# Altium PCB BEE_BOARD.PcbDoc (part 1 of 2)
Units mm, origin at the board's own origin, x right, y up, seen from the top; angles counter-clockwise.
Board outline 146.54 x 65.01 mm, 8 copper layers (Top, GND_1, Signal_1, GND_2, PWR, Signal_2, GND_3, Bottom), stack 1.331 mm thick; 113 components, 76 nets, 368 pads, 14 vias.
Unrouted connection lines stored in the file: 262.
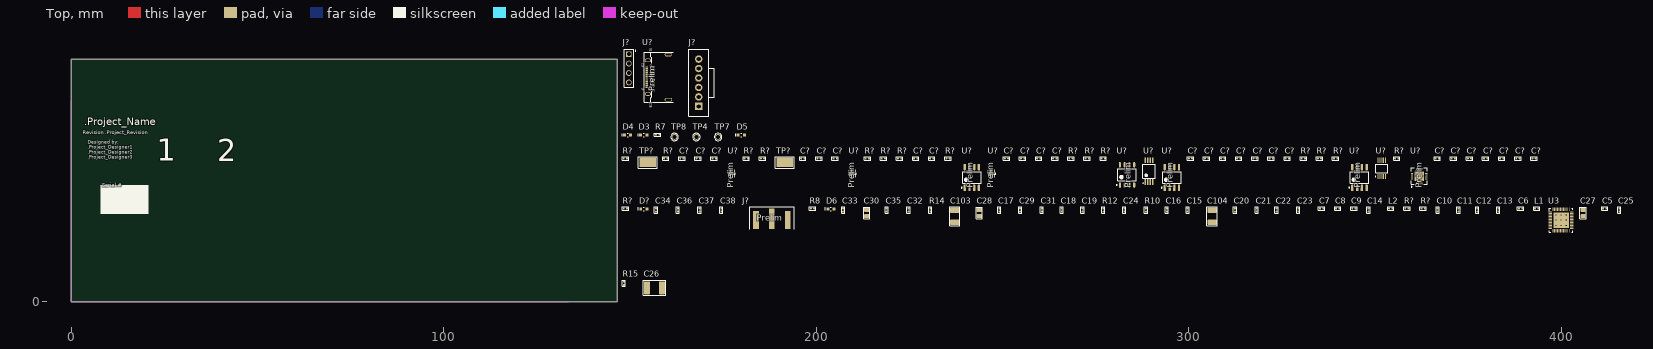
[diagram p0: Top view]
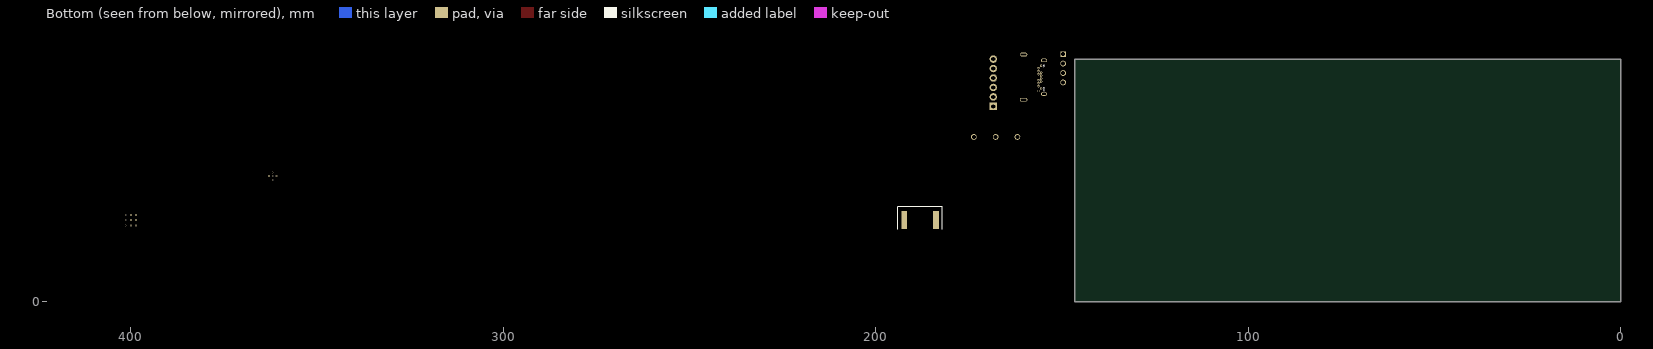
[diagram p1: Bottom view, seen from below]
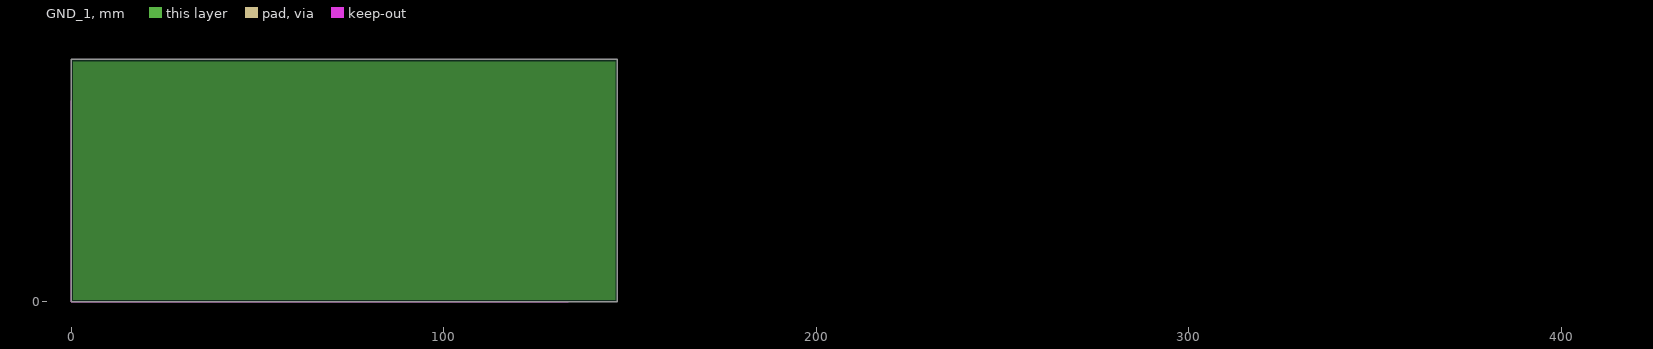
[diagram p2: GND_1, clearances drawn from the general rule]
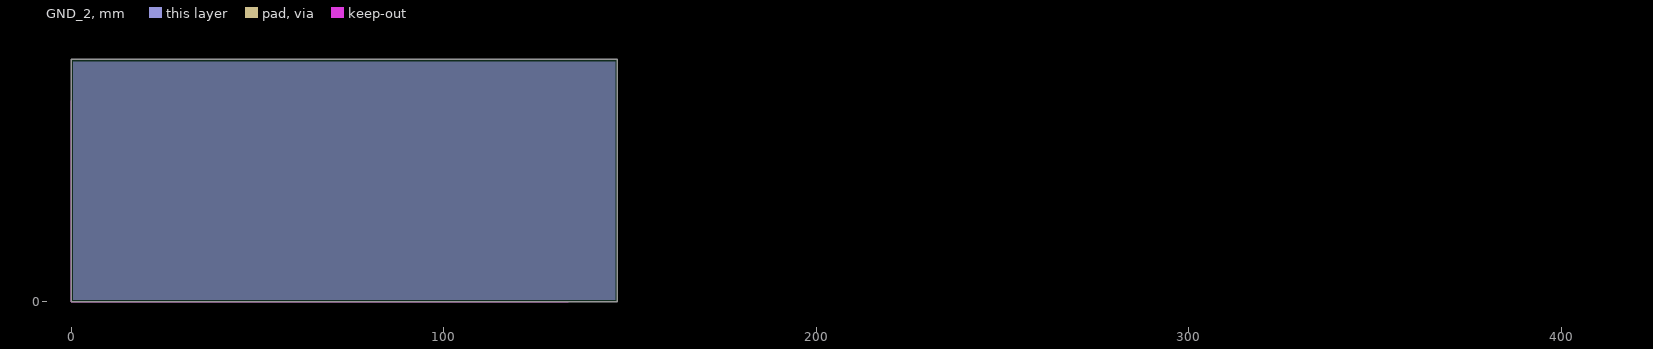
[diagram p3: GND_2, clearances drawn from the general rule]
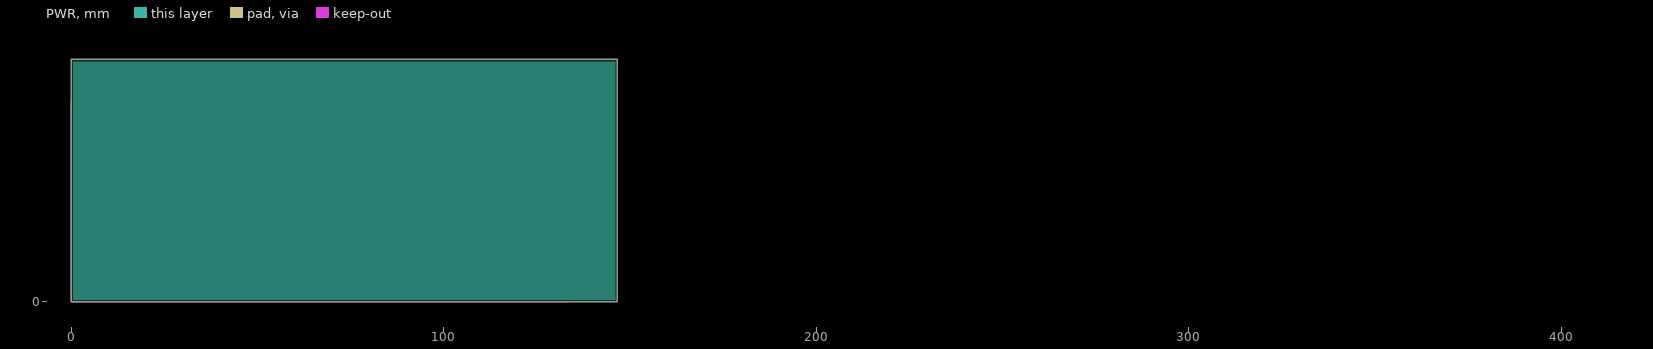
[diagram p4: PWR, clearances drawn from the general rule]
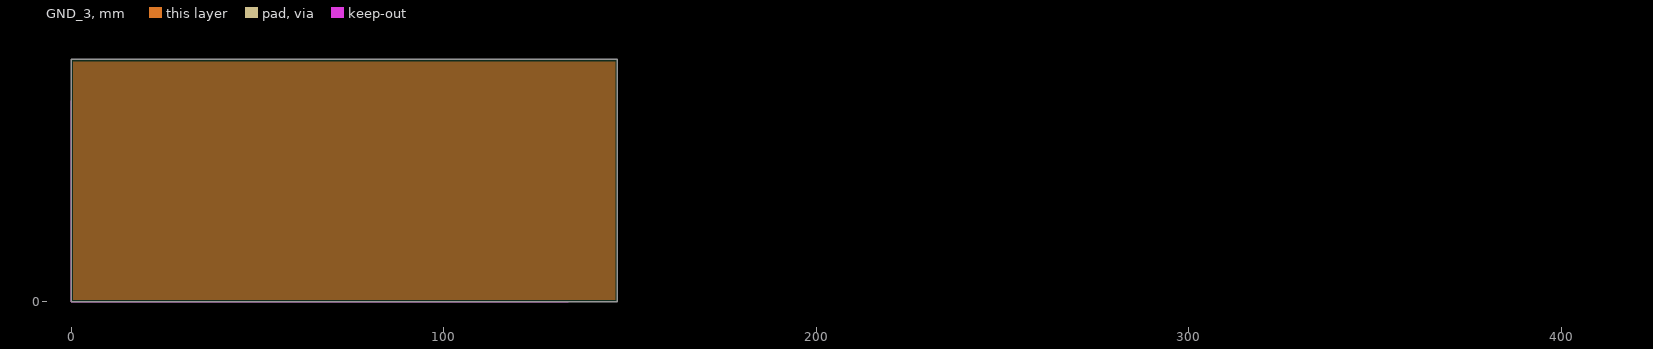
[diagram p5: GND_3, clearances drawn from the general rule]

## Layer stack, top to bottom
Top Solder: solder mask 0.0254, Solder Resist, Dk 4
Top: signal copper 0.0178
Dielectric 1: prepreg 0.0711, PP-006, Dk 4.1
GND_1: plane copper 0.0178
Dielectric 2: core 0.2032, Core-009, Dk 4.5
Signal_1: signal copper 0.0178
Dielectric 3: prepreg 0.2032, PP-006, Dk 4.1
GND_2: plane copper 0.0178
Dielectric 4: core 0.2032, Core-009, Dk 4.5
PWR: plane copper 0.0178
Dielectric 5: prepreg 0.2108, PP-006, Dk 4.1
Signal_2: signal copper 0.0178
Dielectric 6: core 0.2032, Core-009, Dk 4.5
GND_3: plane copper 0.0178
Dielectric 7: prepreg 0.094, PP-006, Dk 4.1
Bottom: signal copper 0.0178
Bottom Solder: solder mask 0.0152, Solder Resist, Dk 3.5

## Board outline
0,0 146.541,0 146.541,65.012 0,65

## Design rules (kind name [scope] priority, off if disabled: settings)
BoardOutlineClearance BoardOutlineClearance-Silk [(OnLayer('Bottom Overlay')) OR (OnLayer('Top Overlay'))] p1: gap=0 ignorepadtopadclearanceinfootprint=FALSE
BoardOutlineClearance BoardOutlineClearance-Fiducials [InComponentClass('Fiducials')] p2: gap=0 ignorepadtopadclearanceinfootprint=FALSE
BoardOutlineClearance BoardOutlineClearance-MouseBites [InComponentClass('MouseBites')] p3: gap=0.254 ignorepadtopadclearanceinfootprint=FALSE except(0: Arc-SplitContinuation Track-SplitContinuation SMDPad-SplitContinuation THPad-OutlineEdge THPad-CavityEdge THPad-CutoutEdge THPad-SplitBarrior THPad-SplitContinuation Via-SplitContinuation Fill-SplitContinuation Poly-SplitContinuation Region-OutlineEdge Region-CavityEdge Region-CutoutEdge Region-SplitBarrior Region-SplitContinuation Text-SplitContinuation; 0.508: Arc-OutlineEdge Track-OutlineEdge SMDPad-OutlineEdge Via-OutlineEdge Fill-OutlineEdge Poly-OutlineEdge Text-OutlineEdge)
BoardOutlineClearance [All] p4: gap=0.254 ignorepadtopadclearanceinfootprint=FALSE except(0: Arc-SplitContinuation Track-SplitContinuation SMDPad-SplitContinuation THPad-SplitContinuation Via-SplitContinuation Fill-SplitContinuation Poly-SplitContinuation Region-SplitContinuation Text-SplitContinuation)
Clearance Clearance_CON_TOP [(TouchesRoom('Ch0_Out_Down') OR TouchesRoom('Ch0_Out_Up') OR  TouchesRoom('Ch1_Out_Down') OR TouchesRoom('Ch1_Out_Up') OR  TouchesRoom('Ch2_Out_Down') OR TouchesRoom('Ch2_Out_Up') OR    TouchesRoom('Ch3_Out_Down') OR TouchesRoom('Ch3_Out_Up') OR    TouchesRoom('Ch4_Out_Down') OR TouchesRoom('Ch4_Out_Up') OR    TouchesRoom('Ch5_Out_Down') OR TouchesRoom('Ch5_Out_Up')   ) AND (InNetClass('HV') OR InNetClass('MID')) AND (OnTop OR OnMultiLayer) vs (TouchesRoom('Ch0_Out_Down') OR TouchesRoom('Ch0_Out_Up') OR  TouchesRoom('Ch1_Out_Down') OR TouchesRoom('Ch1_Out_Up') OR  TouchesRoom('Ch2_Out_Down') OR TouchesRoom('Ch2_Out_Up') OR    TouchesRoom('Ch3_Out_Down') OR TouchesRoom('Ch3_Out_Up') OR    TouchesRoom('Ch4_Out_Down') OR TouchesRoom('Ch4_Out_Up') OR    TouchesRoom('Ch5_Out_Down') OR TouchesRoom('Ch5_Out_Up')   ) AND (OnTop OR OnMultiLayer)] p1: gap=0.152 ignorepadtopadclearanceinfootprint=FALSE
Clearance Clearance_CON_BOT [(TouchesRoom('Ch0_In') OR TouchesRoom('Ch1_In') OR  TouchesRoom('Ch2_In') OR TouchesRoom('Ch3_In') OR  TouchesRoom('Ch4_In') OR TouchesRoom('Ch5_In') ) AND (InNetClass('HV') OR InNetClass('MID')) AND (OnBottom OR OnMultiLayer) vs (TouchesRoom('Ch0_In') OR TouchesRoom('Ch1_In') OR  TouchesRoom('Ch2_In') OR TouchesRoom('Ch3_In') OR  TouchesRoom('Ch4_In') OR TouchesRoom('Ch5_In'))   AND (OnBottom OR OnMultiLayer)] p2: gap=0.152 ignorepadtopadclearanceinfootprint=FALSE
Clearance Clearance_Via [IsVia vs (IsComponent AND NOT HasFootprint('REG_LDO_MIC5303-1.8YMT-TR'))] p3: gap=0.025 ignorepadtopadclearanceinfootprint=FALSE
Clearance HV-HV_EXT [InNetClass('HV') AND (OnTop OR OnBottom) vs InNetClass('HV') AND (OnTop OR OnBottom)] p4: gap=0.813 ignorepadtopadclearanceinfootprint=FALSE
Clearance HV-HV_INT [InNetClass('HV') vs InNetClass('HV')] p5: gap=0.406 ignorepadtopadclearanceinfootprint=FALSE
Clearance HV-MID_EXT [InNetClass('HV') AND (OnTop OR OnBottom) vs InNetClass('MID') AND (OnTop OR OnBottom)] p6: gap=0.406 ignorepadtopadclearanceinfootprint=FALSE
Clearance HV-MID_INT [InNetClass('HV') vs InNetClass('MID')] p7: gap=0.203 ignorepadtopadclearanceinfootprint=FALSE
Clearance HV-ALL_EXT [InNetClass('HV') AND (OnTop OR OnBottom) vs InNetClass('All Nets')] p8: gap=0.813 ignorepadtopadclearanceinfootprint=FALSE
Clearance HV-ALL_INT [InNetClass('HV') vs InNetClass('All Nets')] p9: gap=0.406 ignorepadtopadclearanceinfootprint=FALSE
Clearance MID-ALL_EXT [InNetClass('MID') AND (OnTop OR OnBottom) vs InNetClass('All Nets')] p10: gap=0.406 ignorepadtopadclearanceinfootprint=FALSE
Clearance MID_ALL_INT [InNetClass('MID') vs InNetClass('All Nets')] p11: gap=0.203 ignorepadtopadclearanceinfootprint=FALSE
Clearance [All] p12: gap=0.152 ignorepadtopadclearanceinfootprint=FALSE
ComponentClearance [All] p1: gap=0.102 collisioncheckmode=3 verticalgap=0.102 showdistances=FALSE
DiffPairsRouting [All] p1: maxlimit=0.152 minlimit=0.127 mostfreqgap=0.152 toplayer_mingap=0.152 toplayer_minwidth=0.102 toplayer_maxwidth=0.102 toplayer_prefwidth=0.102 midlayer1_maxgap=0.127 midlayer1_prefgap=0.127 midlayer1_minwidth=0.102 midlayer1_maxwidth=0.102 midlayer1_prefwidth=0.102 midlayer2_maxgap=0.127 midlayer2_prefgap=0.127 midlayer2_minwidth=0.102 midlayer2_maxwidth=0.102 midlayer2_prefwidth=0.102 bottomlayer_mingap=0.152 bottomlayer_minwidth=0.102 bottomlayer_maxwidth=0.102 bottomlayer_prefwidth=0.102 maxuncoupledlength=12.7
HoleSize [All] p1: absolutevalues=TRUE maxlimit=25.4 minlimit=0.102 maxpercent=80.000 minpercent=20.000
HoleToHoleClearance HoleToHoleClearance_Via [All] p1: gap=0.406 allowstackedmicrovias=TRUE
HoleToHoleClearance [All] p2: gap=0.254 allowstackedmicrovias=TRUE
MatchedLengths DiffMatching_WithinPair [InDifferentialPairClass('All Differential Pairs')] p1: tolerance=0.025 checknetsindiffpair=TRUE checkdiffpairvsdiffpair=FALSE checkxsignals=FALSE checkothers=FALSE
MatchedLengths CHANNEL_0 [InxSignalClass('xSignals_J1A_J2A')] p2: tolerance=0.127 checknetsindiffpair=FALSE checkdiffpairvsdiffpair=TRUE checkxsignals=TRUE checkothers=TRUE
MatchedLengths CHANNEL_1 [InxSignalClass('xSignals_J1B_J2B')] p3: tolerance=0.127 checknetsindiffpair=FALSE checkdiffpairvsdiffpair=TRUE checkxsignals=TRUE checkothers=TRUE
MatchedLengths CHANNEL_2 [InxSignalClass('xSignals_J1C_J2C')] p4: tolerance=0.127 checknetsindiffpair=FALSE checkdiffpairvsdiffpair=TRUE checkxsignals=TRUE checkothers=TRUE
MatchedLengths CHANNEL_3 [InxSignalClass('xSignals_J1D_J2D')] p5: tolerance=0.127 checknetsindiffpair=FALSE checkdiffpairvsdiffpair=TRUE checkxsignals=TRUE checkothers=TRUE
MatchedLengths CHANNEL_4 [InxSignalClass('xSignals_J1E_J2E')] p6: tolerance=0.127 checknetsindiffpair=FALSE checkdiffpairvsdiffpair=TRUE checkxsignals=TRUE checkothers=TRUE
MatchedLengths CHANNEL_5 [InxSignalClass('xSignals_J1F_J2F')] p7: tolerance=0.127 checknetsindiffpair=FALSE checkdiffpairvsdiffpair=TRUE checkxsignals=TRUE checkothers=TRUE
MinimumSolderMaskSliver [All] p1: minsoldermaskwidth=0.099
PlaneClearance PlaneClearance_HV [InNetClass('HV')] p1: clearance=0.254
PlaneClearance PlaneClearance_HV_MID [InNet('-HV_MID')] p2: clearance=0.203
PlaneClearance [All] p3: clearance=0.152
PlaneConnect [All] p1: pad.planeconnectstyle=Relief pad.reliefexpansion=0.508 pad.reliefentries=4 pad.reliefconductorwidth=0.254 pad.reliefairgap=0.254 via.planeconnectstyle=Direct via.reliefexpansion=0.508 via.reliefentries=4 via.reliefconductorwidth=0.254 via.reliefairgap=0.254
PolygonConnect [All] p1: thpad.connectstyle=Relief thpad.reliefconductorwidth=0.254 thpad.reliefentries=4 thpad.polygonreliefangle="90 Angle" thpad.airgapwidth=0.254 smdpad.connectstyle=Direct smdpad.reliefconductorwidth=0.254 smdpad.reliefentries=4 smdpad.polygonreliefangle="90 Angle" smdpad.airgapwidth=0.254 via.connectstyle=Direct via.reliefconductorwidth=0.254 via.reliefentries=4 via.polygonreliefangle="90 Angle" via.airgapwidth=0.254
RoomDefinition TOP [InComponentClass('TOP')] p1: confinementstyle=ConfineIn formatcopy=TRUE lockcomponents=FALSE outline 147.684,9.813 364.574,9.813 364.574,70.748 147.684,70.748
RoomDefinition POWER [InComponentClass('POWER')] p2: confinementstyle=ConfineIn formatcopy=TRUE lockcomponents=FALSE outline 147.684,42.909 181.517,42.909 181.517,48.04 147.684,48.04
RoomDefinition MISC [InComponentClass('MISC')] p3: confinementstyle=ConfineIn formatcopy=TRUE lockcomponents=FALSE outline 147.684,9.813 394.877,9.813 394.877,70.748 147.684,70.748
RoomDefinition DECAWAVE [InComponentClass('DECAWAVE')] p4: confinementstyle=ConfineIn formatcopy=TRUE lockcomponents=FALSE outline 147.684,9.813 419.692,9.813 419.692,70.748 147.684,70.748
RoomDefinition BEE_BOARD_TITLE [InComponentClass('BEE_BOARD_TITLE')] p5: confinementstyle=ConfineIn formatcopy=TRUE lockcomponents=FALSE outline 147.684,1.406 159.876,1.406 159.876,8.568 147.684,8.568
RoutingVias [All] p1: holewidth=0.254 width=0.457 viastyle="Through Hole" minholewidth=0.254 minwidth=0.457 maxholewidth=0.254 maxwidth=0.762
SilkToSilkClearance [All] p1: silktosilkclearance=0.025
SilkToSolderMaskClearance [IsPad] p1: minsilkscreentomaskgap=0.025 clearancetoexposedcopper=FALSE
SolderMaskExpansion [All] p1: expansion=0.051 istentingtop=FALSE
Width Width_POW [InNetClass('POWER')] p1: maxlimit=0.813 minlimit=0.152 preferedwidth=0.203 minimp=50.000000 maximp=50.000000 favimp=50.000000
Width [All] p2: maxlimit=0.152 minlimit=0.14 preferedwidth=0.152 toplayer_maxwidth=0.14 toplayer_prefwidth=0.14 midlayer1_minwidth=0.152 midlayer2_minwidth=0.152 bottomlayer_maxwidth=0.14 bottomlayer_prefwidth=0.14 minimp=50.000000 maximp=50.000000 favimp=50.000000
21 further rules are at their usual default settings.

## Classes and differential pairs
component class TOP: J? U?
component class POWER: C1 C2 C3 C4 D3 D4 D5 Q4 R2 R3 R6 R7 TP4 TP7 TP8 U1 U2
component class MISC: C? J? R? TP? U?
component class DECAWAVE: C5 C6 C7 C8 C9 C10 C11 C12 C13 C14 C15 C16 C17 C18 C19 C20 C21 C22 C23 C24 C25 C27 C28 C29 C30 C31 C32 C33 C34 C35 C36 C37 C38 C103 C104 D6 D? J? L1 L2 R8 R10 R12 R14 R? T1 U3
component class BEE_BOARD_TITLE: C26 FID? MTH? R15
differential pair SYNC: +SYNC_P -SYNC_N
differential pair SYNC_BB_LVDS: +SYNC_BB_LVDS_P -SYNC_BB_LVDS_N
differential pair SPI_MOSI: +SPI_MOSI_P -SPI_MOSI_N
differential pair SPI_MISO: +SPI_MISO_P -SPI_MISO_N
differential pair SPI_CLK: +SPI_CLK_P -SPI_CLK_N
differential pair RF: +RF_P -RF_N
differential pair CLK: +CLK_P -CLK_N
differential pair CLK_BB_LVDS: +CLK_BB_LVDS_P -CLK_BB_LVDS_N

## Components (designator, comment, footprint, x,y, rotation, side; value= is the part's Value field where it differs from the comment)
C5 "CGA2B3X7R1E104K050BB" CAP_CER_0402 411.59,25.002 r0 top value=100nF
C6 "CGA2B3X7R1E104K050BB" CAP_CER_0402 389.009,25.002 r0 top value=100nF
C7 "CGA2B3X7R1E104K050BB" CAP_CER_0402 335.618,25.002 r0 top value=100nF
C8 "CGA2B3X7R1E104K050BB" CAP_CER_0402 339.936,25.002 r0 top value=100nF
C9 "CGA2B3X7R1E104K050BB" CAP_CER_0402 344.28,25.002 r0 top value=100nF
C10 "CGA2B3X7R1E104K050BB" CAP_CER_0402 366.759,24.596 r90 top value=100nF
C11 "CL05B103KB5NFNC" CAP_CER_0402 372.347,24.596 r90 top value=10nF
C12 "CC0402KRX7R9BB102" CAP_CER_0402 377.427,24.596 r90 top value=1nF
C13 "CC0402JRNPO9BN120" CAP_CER_0402 383.015,24.596 r90 top value=12pF
C14 "CGA2B3X7R1E104K050BB" CAP_CER_0402 348.191,24.596 r90 top value=100nF
C15 "CC0402JRNPO9BN270" CAP_CER_0402 299.652,24.596 r90 top value=27pF
C16 "C0402C129C5GACTU" CAP_CER_0402 294.064,24.596 r90 top value=1.2pF
C17 "CGA2B3X7R1E104K050BB" CAP_CER_0402 249.106,24.596 r90 top value=100nF
C18 "GRM1555C1H180GA01D" CAP_CER_0402 265.87,24.596 r90 top value=18pF
C19 "CC0402KRX7R9BB821" CAP_CER_0402 271.458,24.596 r90 top value=820pF
C20 "CGA2B3X7R1E104K050BB" CAP_CER_0402 312.352,24.596 r90 top value=100nF
C21 "CL05B103KB5NFNC" CAP_CER_0402 318.194,24.596 r90 top value=10nF
C22 "CC0402KRX7R9BB102" CAP_CER_0402 323.503,24.596 r90 top value=1nF
C23 "CC0402JRNPO9BN120" CAP_CER_0402 329.345,24.596 r90 top value=12pF
C24 "CGA2B3X7R1E104K050BB" CAP_CER_0402 282.634,24.596 r90 top value=100nF
C25 "CGA2B3X7R1E104K050BB" CAP_CER_0402 415.501,24.596 r90 top value=100nF
C26 "PRELIM" CAP_CER_1812 156.574,3.717 r0 top
C27 "C2012X7R1E475K125AE" CAP_CER_0805 405.799,23.808 r90 top value=4.7uF
C28 "C2012X7R1E475K125AE" CAP_CER_0805 243.747,23.808 r90 top value=4.7uF
C29 "CGA2B3X7R1E104K050BB" CAP_CER_0402 254.694,24.596 r90 top value=100nF
C30 "C2012X7R1E475K125AE" CAP_CER_0805 213.521,23.808 r90 top value=4.7uF
C31 "CGA2B3X7R1E104K050BB" CAP_CER_0402 260.536,24.596 r90 top value=100nF
C32 "CC0402JRNPO9BN101" CAP_CER_0402 224.722,24.596 r90 top value=100pF
C33 "CC0402JRNPO9BN120" CAP_CER_0402 207.196,24.596 r90 top value=12pF
C34 "CC0402JRNPO9BN120" CAP_CER_0402 156.98,24.596 r90 top value=12pF
C35 "CGA2B3X7R1E104K050BB" CAP_CER_0402 218.88,24.596 r90 top value=100nF
C36 "CGA2B3X7R1E104K050BB" CAP_CER_0402 162.822,24.596 r90 top value=100nF
C37 "CGA2B3X7R1E104K050BB" CAP_CER_0402 168.664,24.596 r90 top value=100nF
C38 "CGA2B3X7R1E104K050BB" CAP_CER_0402 174.506,24.596 r90 top value=100nF
C103 "C3225X7R1E226M250AB" CAP_CER_1210 237.143,22.919 r90 top value=22uF
C104 "C3225X7R1E226M250AB" CAP_CER_1210 306.231,22.919 r90 top value=22uF
C? "CC0402KRX7R9BB102" CAP_CER_0402 230.996,38.439 r0 top value=1nF
C? "CGA2B3X7R1E104K050BB" CAP_CER_0402 251.036,38.439 r0 top value=100nF
C? "CC0402KRX7R9BB102" CAP_CER_0402 205.037,38.439 r0 top value=1nF
C? "CC0402KRX7R9BB102" CAP_CER_0402 366.657,38.439 r0 top value=1nF
C? "CGA2B3X7R1E104K050BB" CAP_CER_0402 326.373,38.439 r0 top value=100nF
C? "CGA2B3X7R1E104K050BB" CAP_CER_0402 392.616,38.439 r0 top value=100nF
C? "CGA2B3X7R1E104K050BB" CAP_CER_0402 226.678,38.439 r0 top value=100nF
C? "CL05A105KL5NRNC" CAP_CER_0402 196.376,38.439 r0 top value=1uF
C? "CGA2B3X7R1E104K050BB" CAP_CER_0402 264.016,38.439 r0 top value=100nF
C? "CC0402KRX7R9BB102" CAP_CER_0402 388.298,38.439 r0 top value=1nF
C? "CGA2B3X7R1E104K050BB" CAP_CER_0402 172.576,38.439 r0 top value=100nF
C? "CC0402KRX7R9BB102" CAP_CER_0402 322.055,38.439 r0 top value=1nF
C? "CGA2B3X7R1E104K050BB" CAP_CER_0402 379.637,38.439 r0 top value=100nF
C? "CL05A105KL5NRNC" CAP_CER_0402 163.914,38.439 r0 top value=1uF
C? "CC0402KRX7R9BB102" CAP_CER_0402 255.354,38.439 r0 top value=1nF
C? "CC0402KRX7R9BB102" CAP_CER_0402 317.737,38.439 r0 top value=1nF
C? "CC0402KRX7R9BB102" CAP_CER_0402 259.698,38.439 r0 top value=1nF
C? "CGA2B3X7R1E104K050BB" CAP_CER_0402 370.975,38.439 r0 top value=100nF
C? "CC0402KRX7R9BB102" CAP_CER_0402 168.258,38.439 r0 top value=1nF
C? "CGA2B3X7R1E104K050BB" CAP_CER_0402 304.732,38.439 r0 top value=100nF
C? "CGA2B3X7R1E104K050BB" CAP_CER_0402 200.719,38.439 r0 top value=100nF
C? "CC0402KRX7R9BB102" CAP_CER_0402 300.414,38.439 r0 top value=1nF
C? "CL05A105KL5NRNC" CAP_CER_0402 375.293,38.439 r0 top value=1uF
C? "CL05A105KL5NRNC" CAP_CER_0402 309.075,38.439 r0 top value=1uF
C? "CGA2B3X7R1E104K050BB" CAP_CER_0402 313.393,38.439 r0 top value=100nF
C? "CC0402KRX7R9BB102" CAP_CER_0402 383.955,38.439 r0 top value=1nF
D3 "SML-D12P8WT86" LED_SML-D12P8WT86 153.678,44.738 r0 top value="560 nm (green)"
D4 "SML-D12P8WT86" LED_SML-D12P8WT86 149.36,44.738 r0 top value="560 nm (green)"
D5 "SML-D12P8WT86" LED_SML-D12P8WT86 179.866,44.738 r0 top value="560 nm (green)"
D6 "SML-D12P8WT86" LED_SML-D12P8WT86 203.894,24.901 r0 top value="560 nm (green)"
D? "SML-D12P8WT86" LED_SML-D12P8WT86 153.704,24.901 r0 top value="560 nm (green)"
J? "CONSMA020.062-G" CON_SMA_CONSMA020.062-G 188.07,19.465 r0 top value="50 ohm"
J? "CON_HDR_1X4" CON_HDR_1X4 149.69,58.835 r0 top
J? "0705430005" CON_HDR_0705430005 168.436,58.759 r90 top
L1 "BLM15AG601SN1D" FER_0402 393.353,25.002 r0 top value=600R@100Mhz
L2 "BLM15AG601SN1D" FER_0402 354.186,25.002 r0 top value=600R@100Mhz
R7 "RC0402FR-0710KL" RES_0402 157.412,44.84 r0 top value=10k
R8 "RC0402FR-07150RL" RES_0402 198.966,25.002 r0 top value=150R
R10 "RC0402FR-0716KL" RES_0402 288.476,24.596 r90 top value=16k
R12 "RC0402FR-07270RL" RES_0402 277.046,24.596 r90 top value=270R
R14 "RC0402FR-0711KL" RES_0402 230.564,24.596 r90 top value=11k
R15 "PRELIM" RES_0402 148.344,4.962 r90 top
R? "RC0402FR-0710KL" RES_0402 362.847,25.002 r0 top value=10k
R? "RC0402FR-0710KL" RES_0402 358.504,25.002 r0 top value=10k
R? "RC0402FR-07150RL" RES_0402 148.751,25.002 r0 top value=150R
R? "RC0402FR-0710KL" RES_0402 268.334,38.439 r0 top value=10k
R? "RC0402FR-071KL" RES_0402 272.677,38.439 r0 top value=1k
R? "RMCF0402FT110K" RES_0402 181.212,38.439 r0 top value=110K
R? "RMCF0402FT562R" RES_0402 335.034,38.439 r0 top value=562R
R? "RC0402FR-07100RP" RES_0402 276.995,38.439 r0 top value=100R
R? "RC0402FR-071KL" RES_0402 213.698,38.439 r0 top value=1k
R? "RC0402FR-0710KL" RES_0402 222.334,38.439 r0 top value=10k
R? "RC0402FR-0710KL" RES_0402 185.555,38.439 r0 top value=10k
R? "RC0402FR-071KL" RES_0402 218.016,38.439 r0 top value=1k
R? "RC0402FR-07100RP" RES_0402 235.339,38.439 r0 top value=100R
R? "RC0402FR-0784R5L" RES_0402 339.378,38.439 r0 top value=84R5
R? "RMCF0402FT110K" RES_0402 159.596,38.439 r0 top value=110K
R? "RMCF0402FT562R" RES_0402 355.786,38.439 r0 top value=562R
R? "RC0402FR-0710KL" RES_0402 148.751,38.439 r0 top value=10k
R? "RC0402FR-0784R5L" RES_0402 330.716,38.439 r0 top value=84R5
TP4 "100MIL" TPO_TH_ROUND_100MIL 167.801,44.205 r0 top
TP7 "100MIL" TPO_TH_ROUND_100MIL 173.643,44.205 r0 top
TP8 "100MIL" TPO_TH_ROUND_100MIL 161.959,44.205 r0 top
TP? "5019" TPO_SMD_5019 154.77,37.372 r0 top value="3.81mm x 2.03mm"
TP? "5019" TPO_SMD_5019 191.55,37.372 r0 top value="3.81mm x 2.03mm"
U3 "DW1000-I-TR13" COM_XCV_DW1000-I-TR13 399.88,21.878 r0 top
U? "DS25CP102TSQ/NOPB" IC_CROSS_DS25CP102 361.806,33.689 r90 top value=2:2
U? "PI6C49CB01Q3WEX" CLK_BUF_PI6C49CB01Q3WEX 283.396,34.019 r90 top value=1:1
U? "SN74LVC1G07DRLR" BUF_SN74LVC1G07DRLR 209.965,34.4 r90 top value="1 bit"
U? "FIN1028MX" BUF_FIN1028MX 241.74,33.333 r90 top value=400Mbps
U? "SN74LVC1G07DRLR" BUF_SN74LVC1G07DRLR 177.503,34.4 r90 top value="1 bit"
U? "LMK1C1102PWR" COM_BUF_LMK1C1102PWR 289.289,35.01 r90 top
U? "FIN1027AMX" BUF_FIN1027AMX 295.436,33.333 r90 top value=600Mbps
U? "SN74LVC1G07DRLR" BUF_SN74LVC1G07DRLR 247.303,34.4 r90 top value="1 bit"
U? "FIN1028MX" BUF_FIN1028MX 345.778,33.333 r90 top value=400Mbps
U? "TMUX154EDGSR" LOG_MUX_TMUX154EDGSR 351.773,35.797 r90 top value=-
U? "USB-C31-S-RA-EH2.0B-BK-T/R" CON_USB-C_USB-C31-S-RA-EH2.0B-BK-T/R 156.853,60.257 r90 top value=24pins

## Footprints (in the part's own frame and the unit in brackets; to place one, negate y for a bottom-side part, rotate by r counter-clockwise, add the part's x,y. Pads: shape width x height; smd on the part's side, far side on the other; paste and mask are expansions set on the pad)
BUF_FIN1027AMX [mm] "8-SOIC"
  rrect50% 1.75x0.65 smd paste-0.05 mask+0.05: 1(-2.8,1.905) 2(-2.8,0.635) 3(-2.8,-0.635) 4(-2.8,-1.905) 5(2.8,-1.905) 6(2.8,-0.635) 7(2.8,0.635) 8(2.8,1.905)
  silkscreen extent -2.85,-2.5 1.6,2.88, body extent -3,-2.5 3,2.5, height 1.75
BUF_FIN1028MX [mm] "8-SOIC"
  rrect50% 1.75x0.65 smd paste-0.05 mask+0.05: 1(-2.8,1.905) 2(-2.8,0.635) 3(-2.8,-0.635) 4(-2.8,-1.905) 5(2.8,-1.905) 6(2.8,-0.635) 7(2.8,0.635) 8(2.8,1.905)
  silkscreen extent -2.85,-2.5 1.6,2.88, body extent -3,-2.5 3,2.5, height 1.75
BUF_SN74LVC1G07DRLR [mm] "SOT-5"
  rrect50% 0.67x0.3 smd paste-0.05 mask+0.05: 1(-0.74,0.5) 2(-0.74,0) 3(-0.74,-0.5) 4(0.74,-0.5) 5(0.74,0.5)
  silkscreen extent -0.45,-0.8 0.17,1.2, body extent -0.8,-0.8 0.8,0.8, height 0.6
CAP_CER_0402 [mil] "Ceramic Capacitor - 0402"
  rrect60% 20x20 smd paste+0 mask+1.97: 1(-17.5,0) 2(17.5,0)
  silkscreen extent -33,-17 33,17, body extent -19,-10 20,10, height 20
CAP_CER_0805 [mil] "Ceramic Capacitor - 0805"
  rrect37% 43x55 smd paste+0 mask+1.97: 1(-33.5,0) 2(33.5,0)
  silkscreen extent -61,-33 61,33, body extent -39,-24 40,25, height 49
CAP_CER_1210 [mm] "Ceramic Capacitor - 1210"
  rrect40% 1.5x2.5 smd paste+0 mask+0.05: 1(-1.6,0) 2(1.6,0)
  silkscreen extent -2.5,-1.4 2.5,1.4, body extent -1.57,-1.24 1.63,1.26, height 2.5
CAP_CER_1812 [mm]
  rrect25% 1.6x3.5 smd paste-0.025 mask+0.05: 1(-2,0) 2(2,0)
  silkscreen extent -3,-2 3,2, body extent -2.3,-1.6 2.3,1.6, height 1.3
CLK_BUF_PI6C49CB01Q3WEX [mm] "SOIC-8"
  oval 1.45x0.6 smd paste-0.05 mask+0.05: 1(-2.725,1.905) 2(-2.725,0.635) 3(-2.725,-0.635) 4(-2.725,-1.905) 5(2.725,-1.905) 6(2.725,-0.635) 7(2.725,0.635) 8(2.725,1.905)
  silkscreen extent -2.85,-2.5 1.6,2.88, body extent -3,-2.5 3,2.5, height 1.75
COM_BUF_LMK1C1102PWR [mm] "TSOP, 8-Leads, Body 3,00x4,40mm, Pitch 0,65mm, IPC Medium Density"
  rrect20% 1.5x0.45 smd paste-0.05 mask+0.05: 1(-2.9,0.975) 2(-2.9,0.325) 3(-2.9,-0.325) 4(-2.9,-0.975) 5(2.9,-0.975) 6(2.9,-0.325) 7(2.9,0.325) 8(2.9,0.975)
  silkscreen extent -3.25,-1.68 1.85,1.68, body extent -3.2,-1.55 3.2,1.55, height 1.2
COM_XCV_DW1000-I-TR13 [mm] "QFN 48 package, 0.5mm pitch"
  rrect20% 0.95x0.22 smd paste-0.025 mask+0.04: 1(-2.9,2.2) 2(-2.9,1.8) 3(-2.9,1.4) 4(-2.9,1) 5(-2.9,0.6) 6(-2.9,0.2) 7(-2.9,-0.2) 8(-2.9,-0.6) 9(-2.9,-1) 10(-2.9,-1.4) 11(-2.9,-1.8) 12(-2.9,-2.2) 25(2.9,-2.2) 26(2.9,-1.8) 27(2.9,-1.4) 28(2.9,-1) 29(2.9,-0.6) 30(2.9,-0.2) 31(2.9,0.2) 32(2.9,0.6) 33(2.9,1) 34(2.9,1.4) 35(2.9,1.8) 36(2.9,2.2)
  rrect20% 0.22x0.95 smd paste-0.025 mask+0.04: 13(-2.2,-2.9) 14(-1.8,-2.9) 15(-1.4,-2.9) 16(-1,-2.9) 17(-0.6,-2.9) 18(-0.2,-2.9) 19(0.2,-2.9) 20(0.6,-2.9) 21(1,-2.9) 22(1.4,-2.9) 23(1.8,-2.9) 24(2.2,-2.9) 37(2.2,2.9) 38(1.8,2.9) 39(1.4,2.9) 40(1,2.9) 41(0.6,2.9) 42(0.2,2.9) 43(-0.2,2.9) 44(-0.6,2.9) 45(-1,2.9) 46(-1.4,2.9) 47(-1.8,2.9) 48(-2.2,2.9)
  rect 4.2x4.2 smd paste-5 mask+0.07: 49(0,0)
  silkscreen extent -3.27,-3.2 3.2,3.2, body extent -3.05,-3.05 3.05,3.05, height 0.9
CON_HDR_1X4 [mil]
  rect 60x60 hole 40: 1(0,299.61)
  round 60 hole 40: 2(0,199.61) 3(0,99.61) 4(0,0)
  silkscreen extent -50,-50 75,350
CON_HDR_0705430005 [mm]
  rect 2x2 hole 1.092: 1(-6.35,0)
  round 2 hole 1.092: 2(-3.81,0) 3(-1.27,0) 4(1.27,0) 5(3.81,0) 6(6.35,0)
  silkscreen extent -9.02,-4.19 9.02,2.67, body extent -8.89,-4.06 8.89,2.54, height 11.87
CON_SMA_CONSMA020.062-G [mm] "ADGE SMA femal connector"
  rect 1.5x5.6 smd paste-0.05 mask+0.05: 1(0,2.8)
  rect 1.6x4.9 smd: 2(-4.26,2.45) 3(4.26,2.45)
  rect 1.6x4.9 smd far side paste-0.05 mask+0.05: 4(-4.26,2.45) 5(4.26,2.45)
  silkscreen extent -6,0 6,6, body extent -4.76,-9.5 4.76,4.7, height 4.35
CON_USB-C_USB-C31-S-RA-EH2.0B-BK-T/R [mm] "USB-C 24 pins"
  round 0.6 hole 0.65 unplated mask+0: 0(-3.725,0.55)
  rect 0.35x0.7 hole 4.7 square unplated: 0(0,-2.35)
  round 0.6 hole 0.65 slot 0.8 at 0 deg unplated mask+0: 0(3.725,0.55)
  oval 1x1.6 hole 1.1 slot 0.5 at 0 deg: 1(-4.5,2.05) 2(4.5,2.05)
  oval 1x2 hole 1.5 slot 0.5 at 0 deg: 3(-6.075,-3.45) 4(6.075,-3.45)
  rect 0.35x0.7 smd mask+0: A1(-2.75,2.36) A2(-2.25,2.36) A3(-1.75,2.36) A4(-1.25,2.36) A5(-0.75,2.36) A6(-0.25,2.36) A7(0.25,2.36) A8(0.75,2.36) A9(1.25,2.36) A10(1.75,2.36) A11(2.25,2.36) A12(2.75,2.36)
  round 0.65 hole 0.4 mask+0: B1(3.05,1.25) B2(2.4,0.55) B3(1.6,0.55) B4(1.2,1.25) B5(0.8,0.55) B6(0.4,1.25) B7(-0.4,1.25) B8(-0.8,0.55) B9(-1.2,1.25) B10(-1.6,0.55) B11(-2.4,0.55) B12(-3.05,1.25)
  silkscreen extent -6.75,-4.7 6.75,3.1, body extent -6.18,-5.85 6.18,2.8, height 2
FER_0402 [mil] "Ferrite - 0402"
  rrect60% 20x20 smd paste+0 mask+1.97: 1(-17.5,0) 2(17.5,0)
  silkscreen extent -33,-17 33,17, body extent -20,-10 20,10, height 19
IC_CROSS_DS25CP102 [mm] "WQFN-16"
  oval 0.6x0.25 smd paste-0.05 mask+0.05: 1(-1.9,0.75) 2(-1.9,0.25) 3(-1.9,-0.25) 4(-1.9,-0.75) 9(1.9,-0.75) 10(1.9,-0.25) 11(1.9,0.25) 12(1.9,0.75)
  oval 0.25x0.6 smd paste-0.05 mask+0.05: 5(-0.75,-1.9) 6(-0.25,-1.9) 7(0.25,-1.9) 8(0.75,-1.9) 13(0.75,1.9) 14(0.25,1.9) 15(-0.25,1.9) 16(-0.75,1.9)
  rect 2.6x2.6 smd paste-1.3 mask+0.05: 17(0,0)
  silkscreen extent -2.97,-2.2 2.2,2.2, body extent -2.05,-2.05 2.05,2.05, height 0.8
LED_SML-D12P8WT86 [mm] "0603"
  rect 0.8x0.8 smd paste-0.025 mask+0.07: A(0.825,0) K(-0.825,0)
  silkscreen extent -1.45,-0.48 0.13,0.48, body extent -0.8,-0.4 0.8,0.4, height 0.6
LOG_MUX_TMUX154EDGSR [mm] "TSSOP, 10-Leads, Body 3.00x3.00mm, Pitch 0.50mm, IPC Medium Density"
  rrect30% 1.45x0.3 smd paste-0.025 mask+0.05: 1(-2.2,1) 2(-2.2,0.5) 3(-2.2,0) 4(-2.2,-0.5) 5(-2.2,-1) 6(2.2,-1) 7(2.2,-0.5) 8(2.2,0) 9(2.2,0.5) 10(2.2,1)
  silkscreen extent -2.32,-1.6 1.15,1.82, body extent -2.45,-1.55 2.45,1.55, height 1.1
RES_0402 [mil] "Resistor - 0402"
  rrect60% 20x20 smd paste+0 mask+1.97: 1(-17.5,0) 2(17.5,0)
  silkscreen extent -33,-17 33,17, body extent -20,-10 20,10, height 13
TPO_SMD_5019 [mm] "PC TEST POINT MINI SMD"
  rect 4.5x2.53 smd paste-5 mask+0.07: 1(0,0)
  silkscreen extent -2.54,-1.52 2.54,1.52, body extent -1.9,-1.01 1.91,1.02, height 2.29
TPO_TH_ROUND_100MIL [mil]
  round 60 hole 42.91 mask+4: 1(0,0)
  silkscreen extent -39,-39 39,39

## Part data
C5 C6 C7 C8 C9 C10 C14 C17 C20 C24 C25 C29 C31 C35 C36 C37 C38 C? C? C? C? C? C? C? C? C? C? C?: library part CAP_CER_CGA2B3X7R1E104K050BB, "CAP - CER 0.1µF 10% 25V X7R - 0402", Manufacturer #1="TDK Corporation", Package=0402, Supplier Part Number 1=445-6902-1-ND, Temperature="-55°C ~ 125°C", Tolerance=10%, Voltage Rating=25V, Assembly Type=SMD, CreatedBy/Date="Nicolas Roy 2018-11-07", Cryo=UNKNOWN, GRAMS Lib Spec=2.8, HelpURL=https://product.tdk.com/info/en/catalog/datasheets/mlcc_automotive_general_en.pdf, Magnetic Material=Unknown, Part Number #1=CGA2B3X7R1E104K050BB, Polarized=NO, Supplier 1=Digi-Key, VerifiedBy="Nicolas V. (2019-01-22)"
C11 C21: library part CAP_CER_CL05B103KB5NFNC, "CAP - CER 10nF ±10% 50V X7R - 0402", Manufacturer #1="Samsung Electro-Mechanics", Package=0402, Supplier Part Number 1=1276-1499-1-ND, Temperature="-55°C ~ 125°C", Tolerance=10%, Voltage Rating=50V, Assembly Type=SMD, CreatedBy/Date="Keven Deslandes - 2018/11/20", Cryo=UNKNOWN, GRAMS Lib Spec=2.8, HelpURL=http://www.samsungsem.com/kr/support/product-search/mlcc/CL05B103KB5NFNC.jsp, Magnetic Material=Unknown, Part Number #1=CL05B103KB5NFNC, Polarized=No, Supplier 1=Digi-Key, VerifiedBy="Nicolas Roy - 2018/12/11"
C12 C22 C? C? C? C? C? C? C? C? C? C? C?: library part CAP_CER_CC0402KRX7R9BB102, "CAP - CER 1nF 10% 50V X7R - 0402", Manufacturer #1=Yageo, Package=0402, Supplier Part Number 1=311-1036-1-ND, Temperature="-55°C ~ 125°C", Tolerance=10%, Voltage Rating=50V, Assembly Type=SMD, CreatedBy/Date="Jonathan Bouchard 2019-04-06", Cryo=UNKNOWN, GRAMS Lib Spec=2.8, HelpURL=http://www.yageo.com/documents/recent/UPY-GPHC_X7R_6.3V-to-50V_18.pdf, Magnetic Material=UNKNOWN, Part Number #1=CC0402KRX7R9BB102, Polarized=NO, Supplier 1=Digi-Key, VerifiedBy="Nicolas V. (2019-04-30)"
C13 C23 C33 C34: library part CAP_CER_CC0402JRNPO9BN120, "CAP - CER 12pF 50V ±5% C0G, NP0 - 0402", Manufacturer #1=Yageo, Package=0402, Supplier Part Number 1=311-1016-1-ND, Temperature="-55°C ~ 125°C", Tolerance=±5%, Voltage Rating=50V, Assembly Type=SMD, CreatedBy/Date="Philippe Arsenault/ 2020-07-24", Cryo=UNKNOWN, GRAMS Lib Spec=2.8, HelpURL=https://www.yageo.com/upload/media/product/productsearch/datasheet/mlcc/UPY-GP_NP0_16V-to-50V_18.pdf, Magnetic Material=Unknown, Part Number #1=CC0402JRNPO9BN120, Polarized=NO, Supplier 1=Digi-Key, VerifiedBy="Louis-Daniel Gaulin / 2020-07-29"
C15: library part CAP_CER_CC0402JRNPO9BN270, "CAP - CER 27pF 50V ±5% C0G, NP0 - 0402", Manufacturer #1=Yageo, Package=0402, Supplier Part Number 1=311-1019-1-ND, Temperature="-55°C ~ 125°C", Tolerance=±5%, Voltage Rating=50V, Assembly Type=SMD, CreatedBy/Date="Philippe Arsenault/ 2020-07-24", Cryo=UNKNOWN, GRAMS Lib Spec=2.8, HelpURL=https://www.yageo.com/upload/media/product/productsearch/datasheet/mlcc/UPY-GP_NP0_16V-to-50V_18.pdf, Magnetic Material=Unknown, Part Number #1=CC0402JRNPO9BN270, Polarized=NO, Supplier 1=Digi-Key, VerifiedBy="Louis-Daniel Gaulin / 2020-07-29"
C16: library part CAP_CER_C0402C129C5GACTU, "CAP - CER 1.2pF 50V ±0.25pF C0G, NP0 - 0402", Manufacturer #1=KEMET, Package=0402, Supplier Part Number 1=399-1001-1-ND, Temperature="-55°C ~ 125°C", Tolerance=±0.25pF, Voltage Rating=50V, Assembly Type=SMD, CreatedBy/Date="Philippe Arsenault/ 2020-07-24", Cryo=UNKNOWN, GRAMS Lib Spec=2.8, HelpURL=https://content.kemet.com/datasheets/KEM_C1003_C0G_SMD.pdf, Magnetic Material=Unknown, Part Number #1=C0402C129C5GACTU, Polarized=NO, Supplier 1=Digi-Key, VerifiedBy="Louis-Daniel Gaulin / 2020-07-29"
C18: library part CAP_CER_GRM1555C1H180GA01D, "CAP - CER 18pF 50V C0G, NPO - 0402", Manufacturer #1="Murata Electronics North America", Package=0402, Supplier Part Number 1=490-6204-1-ND, Temperature="-55°C ~ 125°C", Tolerance=2%, Voltage Rating=50V, Assembly Type=SMD, CreatedBy/Date="Tommy Rossignol / 2018-11-20", Cryo=UNKNOWN, GRAMS Lib Spec=2.8, HelpURL=https://psearch.en.murata.com/capacitor/product/GRM1555C1H180GA01%23.html, Magnetic Material=UNKNOWN, Note="Not for new Design", Part Number #1=GRM1555C1H180GA01D, Polarized=NO, Supplier 1=Digi-Key, VerifiedBy="Caroline Paulin - 13 fév 2019"
C19: library part CAP_CER_CC0402KRX7R9BB821, "CAP - CER 820pF 50V ±10% X7R - 0402", Manufacturer #1=Yageo, Package=0402, Supplier Part Number 1=311-1727-1-ND, Temperature="-55°C ~ 125°C", Tolerance=±10%, Voltage Rating=50V, Assembly Type=SMD, CreatedBy/Date="Philippe Arsenault/ 2020-07-24", Cryo=UNKNOWN, GRAMS Lib Spec=2.8, HelpURL=https://www.yageo.com/upload/media/product/productsearch/datasheet/mlcc/UPY-GPHC_X7R_6.3V-to-50V_18.pdf, Magnetic Material=Unknown, Part Number #1=CC0402KRX7R9BB821, Polarized=NO, Supplier 1=Digi-Key, VerifiedBy="Louis-Daniel Gaulin / 2020-07-29"
C26: library part CAP_CER_PRELIM, "CAP - CER PRELIM", Manufacturer #1="Würth Elektronik", Part Number #1=885342211009, Supplier Part Number 1=732-12109-1-ND, Temperature="-55°C ~ 125°C", Tolerance=10%, Assembly Type=SMD, CreatedBy/Date="Hubert Dube - 03/02/2021", Cryo=UNKNOWN, GRAMS Lib Spec=2.8, HelpURL=http://www.vishay.com/docs/45228/hvseries.pdf, Magnetic Material=Unknown, Polarized=No, Supplier 1=Digi-Key
C27 C28 C30: library part CAP_CER_C2012X7R1E475K125AE, "CAP - CER 4.7UF 10% 25V X7R - 0805", Manufacturer #1="TDK Corporation", Package=0805, Supplier Part Number 1=445-14537-1-ND, Temperature="-55°C ~ 125°C", Tolerance=10%, Voltage Rating=25V, Assembly Type=SMD, CreatedBy/Date="Keven Deslandes - 2018/11/09", Cryo=UNKNOWN, GRAMS Lib Spec=2.8, HelpURL=https://product.tdk.com/info/en/documents/chara_sheet/C2012X7R1E475K125AE.pdf, Magnetic Material=Unknown, Part Number #1=C2012X7R1E475K125AE, Polarized=No, Supplier 1=Digi-Key, VerifiedBy="Nicolas Roy - 2018/12/11"
C32: library part CAP_CER_CC0402JRNPO9BN101, "CAP - CER 100pF 50V ±5% C0G,CP0 - 0402", Manufacturer #1=Yageo, Package=0402, Supplier Part Number 1=311-1024-1-ND, Temperature="-55°C ~ 125°C", Tolerance=±5%, Voltage Rating=50V, Assembly Type=SMD, CreatedBy/Date="Philippe Arsenault/ 2020-07-24", Cryo=UNKNOWN, GRAMS Lib Spec=2.8, HelpURL=https://www.yageo.com/upload/media/product/productsearch/datasheet/mlcc/UPY-GPHC_X7R_6.3V-to-50V_18.pdf, Magnetic Material=Unknown, Part Number #1=CC0402JRNPO9BN101, Polarized=NO, Supplier 1=Digi-Key, VerifiedBy="Louis-Daniel Gaulin / 2020-07-29"
C103 C104: library part CAP_CER_C3225X7R1E226M250AB, "CAP - CER 22UF 20% 25V X7R - 1210", Manufacturer #1="TDK Corporation", Package=1210, Supplier Part Number 1=445-181602-1-ND, Temperature="-55°C ~ 125°C", Tolerance=20%, Voltage Rating=25V, Assembly Type=SMD, CreatedBy/Date="Nicolas V. (2019-12-11)", Cryo=UNKNOWN, GRAMS Lib Spec=2.8, HelpURL=https://product.tdk.com/info/en/documents/chara_sheet/C3225X7R1E226M250AB.pdf, Magnetic Material=Unknown, Part Number #1=C3225X7R1E226M250AB, Polarized=No, Supplier 1=Digi-Key, VerifiedBy="Nicolas V. (2019-12-11)"
C? C? C? C?: library part CAP_CER_CL05A105KL5NRNC, "CAP - CER 1uF 10% 35V X5R - 0402", Manufacturer #1="Samsung Electro-Mechanics", Package=0402, Supplier Part Number 1=1276-6796-1-ND, Temperature="-55°C ~ 85°C", Tolerance=10%, Voltage Rating=35V, Assembly Type=SMD, CreatedBy/Date="Nicolas Roy 2018-10-03", Cryo=UNKNOWN, GRAMS Lib Spec=2.8, HelpURL=http://www.samsungsem.com/kr/support/product-search/mlcc/__icsFiles/afieldfile/2018/06/19/CL05A105KL5NRNC.pdf, Magnetic Material=Unknown, Part Number #1=CL05A105KL5NRNC, Polarized=NO, Supplier 1=Digi-Key, VerifiedBy="Caroline Paulin - 18 janv 2019"
D3 D4 D5 D6 D?: library part LED_SML-D12P8WT86, "LED - GREEN DIFFUSED 0603 SMD - 0603", Current Rating=1-20mA, Manufacturer #1="Rohm Semiconductor", Package=0603, Supplier Part Number 1=511-1579-2-ND, Temperature="-40 ~ 85 °C", Voltage Rating="2.2V (Forward), 5V (max Reverse)", Assembly Type=SMD, CreatedBy/Date="Keven Deslandes - 2018/11/21", Cryo=UNKNOWN, GRAMS Lib Spec=2.8, HelpURL=https://d1d2qsbl8m0m72.cloudfront.net/en/products/databook/datasheet/opto/led/chip_mono/sml-d12x8_d13x8-e.pdf, Magnetic Material=Unknown, Note="Operate at 2mA", Part Number #1=SML-D12P8WT86, Polarized=Yes, Supplier 1=Digi-Key, VerifiedBy="Caroline Paulin - 13 février 2019"
J?: library part CON_SMA_CONSMA020.062-G, "CON_SMA FML EDGE MNT 0.062\" PCB", Current Rating=-, Manufacturer #1="Linx Technologies Inc.", Manufacturer #2=TBD, Package=EDGE, Supplier Part Number 1=343-CONSMA020.062-G-ND, Temperature="-65°C ~ 165°C", Voltage Rating=500V, Assembly Type=SMT, CreatedBy/Date="Philippe Arsenault/2021-03-26", Cryo=UNKNOWN, GRAMS Lib Spec=2.8, HelpURL=https://linxtechnologies.com/wp/wp-content/uploads/consma020.062-g-ds.pdf, Magnetic Material=Unknown, Part Number #1=CONSMA020.062-G, Part Number #2=TBD, Polarized=Yes, Power Max=-, Supplier 1=Digi-Key, Tolerance=-
J?: "CON - Header 1X4 pins, 100Mils - TH-4", Package=TH-4, Assembly Note=DNI, Assembly Type=TH, CreatedBy/Date="Nicolas V (2020-02-24)", Cryo=UNKNOWN, GRAMS Lib Spec=2.8, Magnetic Material=UNKNOWN, Polarized=No, VerifiedBy="Nicolas V (2020-02-24)"
J?: library part CON_HDR_0705430005, "CON - HDR 6 POS 100mil Shrouded STRAIGHT- TH", Current Rating="3A @ 22AWG", Manufacturer #1="Molex, LLC", Package=TH, Supplier Part Number 1=WM4804-ND, Temperature="-40°C ~ 105°C", Voltage Rating=250V, Assembly Type=TH, CreatedBy/Date="Joel Lemay 2018-08-22", Cryo=UNKNOWN, GRAMS Lib Spec=2.8, HelpURL=https://www.molex.com/pdm_docs/sd/705430001_sd.pdf, Magnetic Material=Unknown, Part Number #1=0705430005, Polarized=Yes, Supplier 1=Digi-Key, VerifiedBy="Caroline Paulin - 10 sept 2018"
L1 L2: library part FER_BLM15AG601SN1D, "FER - FERRITE BEAD 600 OHM@100MHz - 0402", Current Rating=300mA, Manufacturer #1=Murata, Package=0402, Supplier Part Number 1=490-1006-1-ND, Temperature="-55°C ~ 125°C", Assembly Type=SMD, CreatedBy/Date="Philippe Arsenault/2020-07-24", Cryo=UNKNOWN, GRAMS Lib Spec=2.8, HelpURL=https://www.murata.com/en-us/products/productdata/8796740059166/ENFA0018.pdf, Magnetic Material=YES, Part Number #1=BLM15AG601SN1D, Polarized=NO, Supplier 1=Digi-Key
R7 R? R? R? R? R? R?: library part RES_RC0402FR-0710KL, "RES - 10K OHMS 1% 1/16W - 0402", Manufacturer #1=Yageo, Package=0402, Power Max=1/16W, Supplier Part Number 1=311-10.0KLRCT-ND, Temperature="-55°C ~ 155°C", Tolerance=1%, Voltage Rating=50V, Assembly Type=SMD, CreatedBy/Date="Nicolas V. (2018-11-20)", Cryo=UNKNOWN, GRAMS Lib Spec=2.8, HelpURL=http://www.yageo.com/documents/recent/PYu-RC_Group_51_RoHS_L_9.pdf, Magnetic Material=UNKNOWN, Part Number #1=RC0402FR-0710KL, Polarized=NO, Supplier 1=Digi-Key, VerifiedBy="Nicolas V. (2018-11-20)"
R8 R?: library part RES_RC0402FR-07150RL, "RES - 150R 1% 1/16W - 0402", Manufacturer #1=Yageo, Package=0402, Power Max=1/16W, Supplier Part Number 1=311-150LRCT-ND, Temperature="-55°C ~ 155°C", Tolerance=1%, Voltage Rating=50V, Assembly Type=SMD, CreatedBy/Date="Jonathan Bouchard 2019-03-25", Cryo=UNKNOWN, GRAMS Lib Spec=2.8, HelpURL=http://www.yageo.com/documents/recent/PYu-RC_Group_51_RoHS_L_10.pdf, Magnetic Material=Unknown, Part Number #1=RC0402FR-07150RL, Polarized=No, Supplier 1=Digi-Key, VerifiedBy="Nicolas V. (2019-05-02)"
R10: library part RES_RC0402FR-0716KL, "RES - 16k OHM 1% 1/16W - 0402", Manufacturer #1=Yageo, Package=0402, Power Max=1/16W, Supplier Part Number 1=311-16.0KLRCT-ND, Temperature="-55°C ~ 155°C", Tolerance=1%, Voltage Rating=50V, Assembly Type=SMD, CreatedBy/Date="Nicolas Roy/18 oct. 2018", Cryo=UNKNOWN, GRAMS Lib Spec=2.8, HelpURL=http://www.yageo.com/documents/recent/PYu-RC_Group_51_RoHS_L_9.pdf, Magnetic Material=Unknown, Part Number #1=RC0402FR-0716KL, Polarized=NO, Supplier 1=Digi-Key, VerifiedBy="Caroline Paulin - 18/12/2018"
R12: library part RES_RC0402FR-07270RL, "RES - 270 Ohms ±1% 0.063W, 1/16W Chip Resistor 0402  (1005 Metric)", Manufacturer #1=Yageo, Package=0402, Power Max=1/16W, Supplier Part Number 1=311-270LRCT-ND, Temperature="-55°C ~ 155°C", Tolerance=1%, Voltage Rating=50V, Assembly Type=SMD, CreatedBy/Date="Philippe Arsenault/2021-02-08", GRAMS Lib Spec=2.8c, HelpURL=https://www.yageo.com/upload/media/product/productsearch/datasheet/rchip/PYu-RC_Group_51_RoHS_L_11.pdf, Magnetic Material=Unknown, Part Number #1=RC0402FR-07270RL, Polarized=No, Supplier 1=Digi-Key
R14: library part RES_RC0402FR-0711KL, "RES - 11K 1% 1/16W - 0402", Manufacturer #1=Yageo, Package=0402, Power Max=1/16W, Supplier Part Number 1=311-11.0KLRCT-ND, Temperature="-55°C ~ 155°C", Tolerance=1%, Voltage Rating=50V, Assembly Type=SMD, CreatedBy/Date="Keven Deslandes 2018-10-15", Cryo=UNKNOWN, GRAMS Lib Spec=2.8, HelpURL=http://www.yageo.com/documents/recent/PYu-RC_Group_51_RoHS_L_9.pdf, Magnetic Material=Unknown, Part Number #1=RC0402FR-0711KL, Polarized=No, Supplier 1=Digi-Key, VerifiedBy="Carolilne Paulin - 18/12/2018"
R15: library part RES_PRELIM, "RES -PRELIM", Manufacturer #1=Yageo, Package=0402, Part Number #1=RC0402FR-0775RL, Power Max=1/16W, Temperature="-55°C ~ 155°C", Tolerance=1%, Voltage Rating=50V, Assembly Type=SMD, CreatedBy/Date="Hubert Dubé - 3/02/2020", GRAMS Lib Spec=2.8c, HelpURL=https://www.yageo.com/upload/media/product/productsearch/datasheet/rchip/PYu-RC_Group_51_RoHS_L_11.pdf, Magnetic Material=Unknown, Polarized=No
R? R? R?: library part RES_RC0402FR-071KL, "RES - 1K OHM 1% 1/16W - 0402", Manufacturer #1=Yageo, Package=0402, Power Max=1/16W, Supplier Part Number 1=311-1.00KLRCT-ND, Temperature="-55°C ~ 155°C", Tolerance=1%, Voltage Rating=50V, Assembly Type=SMD, CreatedBy/Date="Jonathan Bouchard 2018-07-05", Cryo=UNKNOWN, GRAMS Lib Spec=2.8, HelpURL=http://www.yageo.com/documents/recent/PYu-RC_Group_51_RoHS_L_9.pdf, Magnetic Material=YES, Part Number #1=RC0402FR-071KL, Polarized=NO, Supplier 1=Digi-Key, VerifiedBy="Arnaud Samson 16-07-18"
R? R?: library part RES_RMCF0402FT110K, "RES - 110K ±1% 0.063W, 1/16W Chip Resistor 0402", Manufacturer #1="Stackpole Electronics Inc", Package=0402, Power Max=1/16W, Supplier Part Number 1=RMCF0402FT110KCT-ND, Temperature="-55°C ~ 155°C", Tolerance=1%, Voltage Rating=50V, Assembly Type=SMD, CreatedBy/Date="Philippe Arsenault/2021-04-02", GRAMS Lib Spec=2.8c, HelpURL=https://www.seielect.com/catalog/sei-rmcf_rmcp.pdf, Magnetic Material=Unknown, Part Number #1=RMCF0402FT110K, Polarized=No, Supplier 1=Digi-Key
R? R?: library part RES_RMCF0402FT562R, "RES - 562R ±1% 0.063W, 1/16W Chip Resistor 0402", Manufacturer #1="Stackpole Electronics Inc.", Package=0402, Power Max=1/16W, Supplier Part Number 1=RMCF0402FT562RCT-ND, Temperature="-55°C ~ 155°C", Tolerance=1%, Voltage Rating=50V, Assembly Type=SMD, CreatedBy/Date="Philippe Arsenault/2021-04-02", GRAMS Lib Spec=2.8c, HelpURL=https://www.seielect.com/catalog/sei-rmcf_rmcp.pdf, Magnetic Material=Unknown, Part Number #1=RMCF0402FT562R, Polarized=No, Supplier 1=Digi-Key
R? R?: library part RES_RC0402FR-07100RP, "RES - 100R OHM 1% 1/16W - 0402", Manufacturer #1=Yageo, Package=0402, Power Max=1/16W, Supplier Part Number 1=YAG1248CT-ND, Temperature="-55°C ~ 155°C", Tolerance=1%, Voltage Rating=50V, Assembly Type=SMD, CreatedBy/Date="Jonathan Bouchard 2018-07-05", Cryo=UNKNOWN, GRAMS Lib Spec=2.8, HelpURL=http://www.yageo.com/documents/recent/PYu-RC_Group_51_RoHS_L_9.pdf, Magnetic Material=YES, Part Number #1=RC0402FR-07100RP, Polarized=NO, Supplier 1=Digi-Key, VerifiedBy="Arnaud Samson 16-07-18"
R? R?: library part RES_RC0402FR-0784R5L, "RES - 84R5 1% 1/16W - 0402", Manufacturer #1=Yageo, Package=0402, Power Max=1/16W, Supplier Part Number 1=YAG3246CT-ND, Temperature="-55°C ~ 155°C", Tolerance=1%, Voltage Rating=50V, Assembly Type=SMD, CreatedBy/Date="Philippe Arsenault/ 2021-03-31", GRAMS Lib Spec=2.8c, HelpURL=https://www.yageo.com/upload/media/product/productsearch/datasheet/rchip/PYu-RC_Group_51_RoHS_L_11.pdf, Magnetic Material=Unknown, Part Number #1=RC0402FR-0784R5L, Polarized=No, Supplier 1=Digi-Key
TP4 TP7 TP8: library part TPO_TH_ROUND_100MIL, "TPO - TEST POINT ROUND TH  - 100MIL", Package="100 MIL round", Assembly Type=NONE, CreatedBy/Date="Louis-Daniel Gaulin/ 14/01/2020", Cryo=UNKNOWN, GRAMS Lib Spec=2.8c, Magnetic Material=NO, VerifiedBy="C.Paulin - 21/01/2020"
TP? TP?: library part TPO_SMD_5019, "TPO - PC TEST POINT MINI - SMD", Manufacturer #1="Keystone Electronics", Package=SMD, Supplier Part Number 1=36-5019CT-ND, Assembly Type=SMD, CreatedBy/Date="Olivier Bernard / 5/12/2017", Cryo=UNKNOWN, GRAMS Lib Spec=2.8, HelpURL=https://www.digikey.ca/product-detail/en/keystone-electronics/5019/36-5019CT-ND/3907344, Magnetic Material=UNKNOWN, Part Number #1=5019, Polarized=No, Supplier 1=Digi-Key, VerifiedBy="Caroline Paulin / 5 juillet 2018"
U3: library part COM_XCV_DW1000-I-TR13, "COM - IC RF TxRx 802.15.4 IR-UWB DECAWAVE - 48-VFQFN EP", Current Rating="Rx 64mA/Tx 31mA", Manufacturer #1=Decawave, Manufacturer #2=Qorvo, Package="QFN 48", Supplier Part Number 1=1479-1001-1-ND, Temperature="-40°C ~ 85°C", Voltage Rating="2.8 - 3.6 V", Assembly Type=SMT, CreatedBy/Date="Philippe Arsenault/13-07-2020", Cryo=No, GRAMS Lib Spec=2.8, HelpURL=https://www.decawave.com/sites/default/files/resources/DW1000-Datasheet-V2.12.pdf, Magnetic Material=Unknown, Part Number #1=DW1000-I-TR13, Polarized=Yes, Supplier 1=Digi-Key
U?: library part IC_CROSS_DS25CP102TSQ/NOPB, "IC_CROSS - Crosspoint Switch 1 x 2:2 16-WQFN (4x4) 3.125Gbps", Current Rating=+-55mA, Manufacturer #1="Texas Instrument", Package=16-WQFN, Power Max=180mW, Supplier Part Number 1=DS25CP102TSQ/NOPBCT-ND, Temperature="-40°C ~ 85°C", Voltage Rating="3V ~ 3.6V", Assembly Type=SMT, CreatedBy/Date="Philippe Arsenault/2021-04-01", GRAMS Lib Spec=2.7, HelpURL=https://www.ti.com/lit/ds/symlink/ds25cp102.pdf?HQS=dis-dk-null-digikeymode-dsf-pf-null-wwe&ts=1617306001217, Magnetic Material=UNKNOWN, Part Number #1=DS25CP102TSQ/NOPB, Polarized=YES, Supplier 1=Digi-Key
U?: library part CLK_BUF_PI6C49CB01Q3WEX, "CLK_BUF - Clock Translator IC 1:1 8-SOIC (0.154\", 3.90mm Width)", Manufacturer #1="Diodes Incorporated", Package=8-SOIC, Supplier Part Number 1=31-PI6C49CB01Q3WEXCT-ND, Temperature="-40 to 85°C", Voltage Rating="3 - 3.6V", Assembly Type=SMT, CreatedBy/Date="Philippe Arsenault/2021-03-26", GRAMS Lib Spec=2.7, HelpURL=https://www.diodes.com/assets/Datasheets/PI6C49CB01Q.pdf, Magnetic Material=Unknown, Part Number #1=PI6C49CB01Q3WEX, Polarized=Yes, Supplier 1=Digi-Key
U? U? U?: library part BUF_SN74LVC1G07DRLR, "BUF -  Buffer, Non-Inverting 1 Element 1 Bit per Element Open Drain Output SOT-5", Current Rating=+-100mA, Package=SOT-5, Supplier Part Number 1=296-18010-1-ND, Temperature="-40°C ~ 125°C (TA)", Voltage Rating="1.65V ~ 5.5V", Assembly Type=SMT, CreatedBy/Date="Philippe Arsenault/2021-03-26", GRAMS Lib Spec=2.7, HelpURL=https://www.ti.com/general/docs/suppproductinfo.tsp?distId=10&gotoUrl=http%3A%2F%2Fwww.ti.com%2Flit%2Fgpn%2Fsn74lvc1g07, Magnetic Material=Unknown, Part Number #1=SN74LVC1G07DRLR, Polarized=YES, Supplier 1=Digi-Key
U? U?: library part BUF_FIN1028MX, "BUF - 3V3 LVDS to LVCMOS, 2 bits, High-SPEED, DIFF receiver", Manufacturer #1="ON Semiconductor", Package=SOIC-8, Power Max="9mA * 3.3V", Supplier Part Number 1=FIN1028MXCT-ND, Temperature="-40°C ~ 85°C", Voltage Rating="3V ~ 3.6V", Assembly Type=SMT, CreatedBy/Date="Philippe Arsenault/2021-04-01", GRAMS Lib Spec=2.7, HelpURL=https://www.onsemi.com/pdf/datasheet/fin1028-d.pdf, Magnetic Material=Unknown, Part Number #1=FIN1028MX, Polarized=YES, Supplier 1=Digi-Key
U?: library part COM_BUF_LMK1C1102PWR, "COM - BUF - Clock buffer 3V3, 2V5, 1V8 2 Channel - TSSOP 8", Current Rating="Input +-20mA ; Output +- 50mA", Manufacturer #1="Texas Instruments", Package="TSSOP 8 pin", Power Max=132mW, Temperature="–40°C to 125°C", Voltage Rating="1.71V ~ 1.89V, 2.375V ~ 2.625V, 3.135V ~ 3.465V", Assembly Type=SMT, CreatedBy/Date="Philippe Arsenault/20-07-2020", Cryo=No, GRAMS Lib Spec=2.8, HelpURL=https://www.ti.com/lit/ds/symlink/lmk1c1102.pdf?ts=1595262014854&ref_url=https%253A%252F%252Fwww.ti.com%252Fproduct%252FLMK1C1102%253Futm_source%253Dgoogle%2526utm_medium%253Dcpc%2526utm_campaign%253Dasc-null-null-GPN_EN-cpc-pf-google-wwe%2526utm_content%253DLMK1C1102%2526ds_k%253DLMK1C1102%2526DCM%253Dyes%2526gclid%253DCjwKCAjwgdX4BRB_EiwAg8O8HUIvo-ksMfq8YInqTklLXWuMoCGXxsnhq04Fqr4kdDFQPSc0fYG9iRoCPvAQAvD_BwE%2526gclsrc%253Daw.ds, Magnetic Material=Unknown, Part Number #1=LMK1C1102PWR, Polarized=Yes, VerifiedBy="Louis-Daniel Gaulin / 23-07-2020"
U?: library part BUF_FIN1027AMX, "BUF - 3V3 LVCMOS to LVDS, 2 bits, High-SPEED, DIFF driver", Manufacturer #1="ON Semiconductor", Package=SOIC-8, Power Max="17mA * 3.3V", Supplier Part Number 1=FIN1027AMXCT-ND, Temperature="-40°C ~ 85°C", Voltage Rating="3V ~ 3.6V", Assembly Type=SMT, CreatedBy/Date="Philippe Arsenault/2021-04-01", GRAMS Lib Spec=2.7, HelpURL=https://www.onsemi.com/pdf/datasheet/fin1027a-d.pdf, Magnetic Material=Unknown, Part Number #1=FIN1027AMX, Polarized=YES, Supplier 1=Digi-Key
U?: library part LOG_MUX_TMUX154EDGSR, "LOG_MUX -  SWITCH SPDT DUAL 2:1 - 10-VSSOP", Current Rating=10uA, Manufacturer #1="Texas Instruments", Manufacturer #2=-, Package=10-VSSOP, Power Max=50uW, Supplier Part Number 1=296-48347-1-ND, Temperature="-40°C ~ 85°C", Voltage Rating="3V ~ 4.3V", Assembly Type=SMD, CreatedBy/Date="Louis-Daniel Gaulin / 06-10-2020", GRAMS Lib Spec=2.8C, HelpURL=https://www.ti.com/lit/ds/symlink/tmux154e.pdf?HQS=TI-null-null-digikeymode-df-pf-null-wwe&ts=1602037764538, Magnetic Material=Unknown, Note=-, Part Number #1=TMUX154EDGSR, Part Number #2=-, Polarized=YES, Supplier 1=Digi-Key, Tolerance=-, VerifiedBy="Philippe Arsenault/2020-11-06"
U?: library part CON_USB-C_USB-C31-S-RA-EH2.0B-BK-T/R, "CON_USB-C- USB 3.2 Gen 2 (USB 3.1 Gen 2, Superspeed + (USB 3.1)) Receptacle Connector 24 Position Board Edge, Cutout; Surface Mount; Through Hole, Right Angle", Current Rating="0.25A, 1.25A, 5A / (I/O, VConn(SBU) 5Afor all Vbus)", Manufacturer #1="Adam Tech", Supplier Part Number 1=2057-USB-C31-S-RA-EH2.0B-BK-T/RCT-ND, Temperature="-40°C ~ 85°C", Voltage Rating="100 VAC RMS", Assembly Type="TH and SMT", CreatedBy/Date="Philippe Arsenault/2021-03-30", GRAMS Lib Spec=2.7, HelpURL=https://adam-tech.com/downloader.php?p=USB-C31-S-RA-EH2.0B-BK-TR.pdf, Magnetic Material=Unknown, Part Number #1=USB-C31-S-RA-EH2.0B-BK-T/R, Polarized=YES, Supplier 1=Digi-Key

## Via types
v1: diameter 0.5, hole 0.3, Top to Bottom, 9 vias
v2: diameter 0.5, hole 0.2, Top to Bottom, 5 vias

## Nets (pads, with @x,y where several pads share a name; then routed paths per layer and width w, separated by ;. In a path a pad name is that pad's centre, name@x,y a point inside that pad or via, vN(x,y) a via of type N, cw(c..) or ccw(c..) an arc to the next point about the centre after c; other vN are vias at no path point)
1V8: C5.2 C27.2 C30.2 C35.2 R7.1 TP8.1 U3.26 U3.48
3V3: C17.2 C24.2 C25.2 C28.2 C103.2 C104.2 C?.1@250.592,38.439 C?.2@164.359,38.439 C?.2@168.702,38.439 C?.2@173.02,38.439 C?.2@196.82,38.439 C?.2@201.163,38.439 C?.2@205.481,38.439 C?.2@227.122,38.439 C?.2@231.44,38.439 C?.2@255.799,38.439 C?.2@260.142,38.439 C?.2@264.46,38.439 C?.2@300.858,38.439 C?.2@305.176,38.439 C?.2@309.52,38.439 C?.2@313.838,38.439 C?.2@318.181,38.439 C?.2@322.499,38.439 C?.2@326.817,38.439 C?.2@367.102,38.439 C?.2@371.42,38.439 C?.2@375.738,38.439 C?.2@380.081,38.439 C?.2@384.399,38.439 C?.2@388.742,38.439 C?.2@393.06,38.439 L1.1 L2.1 R?.1@358.059,25.002 R?.1@362.403,25.002 R?.2@149.195,38.439 R?.2@186,38.439 R?.2@218.461,38.439 R?.2@222.779,38.439 R?.2@268.778,38.439 TP7.1 U3.15 U3.25 U3.47 U?.1@293.531,30.533 U?.5@177.003,35.14 U?.5@209.465,35.14 U?.5@246.803,35.14 U?.6@289.614,37.91 U?.8@239.835,36.133 U?.8@281.491,36.744 U?.8@343.873,36.133 U?.10@350.773,37.997 U?.13 U?.14 U?.16
5V: TP4.1 U?.A4 U?.A9 U?.B4 U?.B9
BB_CLK: U?.8@288.314,37.91
CC2: R?.2@160.041,38.439 U?.B5
CLK_BB_LVDS_N: R?.1@276.551,38.439 U?.3@284.031,31.294 U?.11
CLK_BB_LVDS_P: R?.2@277.44,38.439 U?.2@282.761,31.294 U?.12
CLK_N: R?.1@355.341,38.439 U?.A3
CLK_OUT: U3.3 U?.3@289.614,32.11
CLK_P: R?.2@356.23,38.439 U?.A2
DW_IRQ_BB: U3.45 U?.2@177.503,33.66
DW_IRQ_HB: R?.2@181.656,38.439 U?.4@178.003,35.14 U?.A5
DW_RESET_BB: U3.27 U?.1@361.056,31.789 U?.4@210.464,35.14
DW_RESET_HB: U?.2@209.965,33.66 U?.A8
EQ: U?.6@363.706,33.439
EXTON: J?.1@149.69,66.445 U3.21